# EAGLE board Smashing Fulffy (EAGLE 9.7.0)

Size 270.25 x 172.64 mm. Coordinates in mm from the lower left corner, seen from the top.
Outline: 0,0 270.25,0 270.25,172.64 0,172.64 0,0
Copper layers (1*16): Top 0.035mm / dielectric 1.5mm / Bottom 0.035mm
Design rules "default": minimum track width 6mil, minimum drill 0.35mm, track to track 6mil, track to pad 6mil, pad to pad 6mil, via to via 6mil, smd to smd 6mil, copper to edge 40mil, drill to drill 6mil, minimum pad ring 10mil, minimum via ring 8mil, stop-mask expansion 4mil, vias tented up to drill 0mil, thermal gap 10mil

## Footprints (pad centres in the part's own frame; a part is rotated, then mirrored left to right if it is on the bottom)
CAP-THRU-2.54MM = drill 1.016 pad 1.88: 1 -1.27,0; 2 1.27,0
LEDRD254W60D565H860B = drill 0.981 pad 1.581: 1 -1.27,0; 2 1.27,0
LEDRD254W60D565H860B_G = drill 0.981 pad 1.581: 1 -1.27,0; 2 1.27,0
LEDRD254W60D565H860B_B = drill 0.981 pad 1.581: 1 -1.27,0; 2 1.27,0
HC-SR04 = drill 1.016 long: 1 -3.81,0; 2 -1.27,0; 3 1.27,0; 4 3.81,0
BATTERY-GENERIC = drill 1.118 pad 3.15 octagon: + 2.54,0; - -2.54,0
RESAD1016W63L850D250B = drill 0.83 pad 1.43: 1 -5.08,0; 2 5.08,0
TO92 = drill 0.813 octagon: 1 -1.27,0; 2 0,1.905; 3 1.27,0
DIP826W53P254L959H508Q8B = drill 0.786 pad 1.386: 1 -4.13,3.81; 2 -4.13,1.27; 3 -4.13,-1.27; 4 -4.13,-3.81; 5 4.13,-3.81; 6 4.13,-1.27; 7 4.13,1.27; 8 4.13,3.81
DIP762W53P254L1969H508Q16B = drill 0.743 pad 1.343: 1 -3.81,8.89; 2 -3.81,6.35; 3 -3.81,3.81; 4 -3.81,1.27; 5 -3.81,-1.27; 6 -3.81,-3.81; 7 -3.81,-6.35; 8 -3.81,-8.89; 9 3.81,-8.89; 10 3.81,-6.35; 11 3.81,-3.81; 12 3.81,-1.27; 13 3.81,1.27; 14 3.81,3.81; 15 3.81,6.35; 16 3.81,8.89

## Placement (x,y rotation side)
C1  220p  [CAP-THRU-2.54MM]  58.92,111.19 0 top
C2  100n  [CAP-THRU-2.54MM]  117.16,52.87 0 top
C3  100n  [CAP-THRU-2.54MM]  168.73,131.65 0 top
D1  RED  [LEDRD254W60D565H860B]  69.41,24.39 180 top
D2  RED  [LEDRD254W60D565H860B]  62.66,25.72 180 top
D3  RED  [LEDRD254W60D565H860B]  52.66,26.49 180 top
D4  RED  [LEDRD254W60D565H860B]  38.01,26.5 180 top
D5  RED  [LEDRD254W60D565H860B]  45.18,26.97 180 top
D6  RED  [LEDRD254W60D565H860B]  100.73,25.48 180 top
D7  GREEN  [LEDRD254W60D565H860B_G]  141.1,9.44 180 top
D8  RED  [LEDRD254W60D565H860B]  80.11,22.94 180 top
D9  RED  [LEDRD254W60D565H860B]  89.06,22.57 180 top
D10  GREEN  [LEDRD254W60D565H860B_G]  133.71,8.73 180 top
D11  RED  [LEDRD254W60D565H860B]  108.58,25.9 180 top
D12  GREEN  [LEDRD254W60D565H860B_G]  126.18,8.26 180 top
D13  GREEN  [LEDRD254W60D565H860B_G]  147.74,9.59 180 top
D14  GREEN  [LEDRD254W60D565H860B_G]  154.84,9.44 180 top
D15  GREEN  [LEDRD254W60D565H860B_G]  161.48,9.59 180 top
D16  GREEN  [LEDRD254W60D565H860B_G]  167.15,10.06 180 top
D17  GREEN  [LEDRD254W60D565H860B_G]  175.26,9.7 180 top
D18  GREEN  [LEDRD254W60D565H860B_G]  119.02,8.05 180 top
D19  BLUE  [LEDRD254W60D565H860B_B]  211.32,88.3 180 top
D20  BLUE  [LEDRD254W60D565H860B_B]  218.29,87.68 180 top
D21  BLUE  [LEDRD254W60D565H860B_B]  224.84,87.55 180 top
D22  BLUE  [LEDRD254W60D565H860B_B]  231.52,87.18 180 top
D23  BLUE  [LEDRD254W60D565H860B_B]  238.69,86.6 180 top
D24  BLUE  [LEDRD254W60D565H860B_B]  244.86,87.47 180 top
D25  BLUE  [LEDRD254W60D565H860B_B]  251.69,87.47 180 top
D26  BLUE  [LEDRD254W60D565H860B_B]  258.06,87.47 180 top
D27  BLUE  [LEDRD254W60D565H860B_B]  264.19,87.47 180 top
DIST1  DISTANCE-SENSOR-4PINHC-SR04  [HC-SR04]  117.05,164.07 0 top
P1  BATTERYGENERIC  [BATTERY-GENERIC]  8.26,104.07 180 top
R1  100k  [RESAD1016W63L850D250B]  88.75,163.67 90 top
R2  2k  [RESAD1016W63L850D250B]  30.43,77.1 90 top
R3  3k  [RESAD1016W63L850D250B]  184.1,125.02 90 top
R4  3k  [RESAD1016W63L850D250B]  177.23,122.73 90 top
R5  1000  [RESAD1016W63L850D250B]  36.73,21.42 90 top
R6  33k  [RESAD1016W63L850D250B]  128.08,155.12 90 top
R7  200k  [RESAD1016W63L850D250B]  48.88,165.74 0 top
T2  NPN  [TO92]  22.64,86.88 180 top
U2_HZ  LM555_DIP  [DIP826W53P254L959H508Q8B]  139.18,119.02 90 top
U3  74HC4017_PDIP  [DIP762W53P254L1969H508Q16B]  77.63,76.82 90 top
U4  74HC4017_PDIP  [DIP762W53P254L1969H508Q16B]  109.21,76.31 90 top
U5  74HC4017_PDIP  [DIP762W53P254L1969H508Q16B]  135.57,78.51 90 top
U17.8KHZ  LM555_DIP  [DIP826W53P254L959H508Q8B]  85.83,119.02 90 top

## Library data of the parts
C1-C3 DIST1 P1 R1-R7 U3-U5 = Tinkercad
D1-D6 D8 D9 D11 = Tinkercad; CATEGORY: Opto-Electronic; SUB-CATEGORY: LED; VALUE: LED_RED
D7 D10 D12-D18 = Tinkercad; CATEGORY: Opto-Electronic; SUB-CATEGORY: LED; VALUE: LED_GREEN
D19-D27 = Tinkercad; CATEGORY: Opto-Electronic; SUB-CATEGORY: LED; VALUE: LED_BLUE
T2 = Tinkercad; CATEGORY: Transistor; SUB-CATEGORY: BJT; TYPE: NPN
U2_HZ U17.8KHZ = Tinkercad; CATEGORY: IC_Clock-Timing; CURRENT-SUPPLY: 10mA; DESCRIPTION: IC OSC SINGLE TIMER 100KHZ 8-DIP; FREQUENCY: 100kHz; MANUFACTURER: Texas Instruments; MPN: LM555CN/NOPB; OPERATING_TEMP: 0°C to 70°C; PART_STATUS: Active; ROHS_COMPLIANT: ROHS3 Compliant; SUB-CATEGORY: Timer

## Nets
D4_C: D1.2 D2.2 D3.2 D4.2 D5.2 D6.2 D7.2 D8.2 D9.2 D10.2 D11.2 D12.2 D13.2 D14.2 D15.2 D16.2 D17.2 D18.2 R5.2
DIST1_ECHO: C2.2 DIST1.3 R2.1 R6.2 U3.13 U4.13 U5.13
DIST1_TRIG: DIST1.2 U2_HZ.3
P1+: DIST1.1 P1.+ R1.1 R1.2 R3.2 R7.2 U2_HZ.4 U2_HZ.8 U3.16 U4.16 U5.16 U17.8KHZ.4 U17.8KHZ.7 U17.8KHZ.8
P1-: C1.2 C3.2 DIST1.4 P1.- R5.1 R6.1 U2_HZ.1 U3.8 U4.8 U5.8 U17.8KHZ.1
T2_B: R2.2 T2.2
U2_HZ_DIS: R3.1 R4.2 U2_HZ.7
U2_HZ_THR: C3.1 R4.1 U2_HZ.2 U2_HZ.6
U3_CLK: T2.3 U3.14
U3_MR: C2.1 U3.15 U4.15 U5.15
U3_Q0: D4.1 U3.3
U3_Q1: D5.1 U3.2
U3_Q2: D3.1 U3.4
U3_Q3: D2.1 U3.7
U3_Q4: D1.1 U3.10
U3_Q5: D8.1 U3.1
U3_Q6: D9.1 U3.5
U3_Q7: D6.1 U3.6
U3_Q8: D11.1 U3.9
U3_Q9: U3.11 U4.14
U4_Q0: D18.1 U4.3
U4_Q1: D12.1 U4.2
U4_Q2: D10.1 U4.4
U4_Q3: D7.1 U4.7
U4_Q4: D13.1 U4.10
U4_Q5: D14.1 U4.1
U4_Q6: D15.1 U4.5
U4_Q7: D16.1 U4.6
U4_Q8: D17.1 D19.2 D20.2 D21.2 D22.2 D23.2 D24.2 D25.2 D26.2 D27.2 U4.9
U4_Q9: U4.11 U5.14
U5_Q0: D19.1 U5.3
U5_Q1: D20.1 U5.2
U5_Q2: D21.1 U5.4
U5_Q3: D22.1 U5.7
U5_Q4: D23.1 U5.10
U5_Q5: D24.1 U5.1
U5_Q6: D25.1 U5.5
U5_Q7: D26.1 U5.6
U5_Q8: D27.1 U5.9
U17.8KHZ_OUT: T2.1 U17.8KHZ.3
U17.8KHZ_THR: C1.1 R7.1 U17.8KHZ.2 U17.8KHZ.6

## Tracks (layer width: path | path; a pad name or v marks a point on that pad's centre or on a via)
D4_C  (18 unrouted)
DIST1_ECHO  (6 unrouted)
DIST1_TRIG  (1 unrouted)
P1+  (13 unrouted)
P1-  (10 unrouted)
T2_B  (1 unrouted)
U2_HZ_DIS  (2 unrouted)
U2_HZ_THR  (3 unrouted)
U3_CLK  (1 unrouted)
U3_MR  (3 unrouted)
U3_Q0  (1 unrouted)
U3_Q1  (1 unrouted)
U3_Q2  (1 unrouted)
U3_Q3  (1 unrouted)
U3_Q4  (1 unrouted)
U3_Q5  (1 unrouted)
U3_Q6  (1 unrouted)
U3_Q7  (1 unrouted)
U3_Q8  (1 unrouted)
U3_Q9  (1 unrouted)
U4_Q0  (1 unrouted)
U4_Q1  (1 unrouted)
U4_Q2  (1 unrouted)
U4_Q3  (1 unrouted)
U4_Q4  (1 unrouted)
U4_Q5  (1 unrouted)
U4_Q6  (1 unrouted)
U4_Q7  (1 unrouted)
U4_Q8  (10 unrouted)
U4_Q9  (1 unrouted)
U5_Q0  (1 unrouted)
U5_Q1  (1 unrouted)
U5_Q2  (1 unrouted)
U5_Q3  (1 unrouted)
U5_Q4  (1 unrouted)
U5_Q5  (1 unrouted)
U5_Q6  (1 unrouted)
U5_Q7  (1 unrouted)
U5_Q8  (1 unrouted)
U17.8KHZ_OUT  (1 unrouted)
U17.8KHZ_THR  (3 unrouted)